# Altium PCB PFC-120W.PcbDoc
Units mil, origin at the board's own origin, x right, y up, seen from the top; angles counter-clockwise.
Board outline 4015.75 x 3385.83 mil, 2 copper layers (Top Layer, Bottom Layer); 25 components, 20 nets, 72 pads, 5 vias.
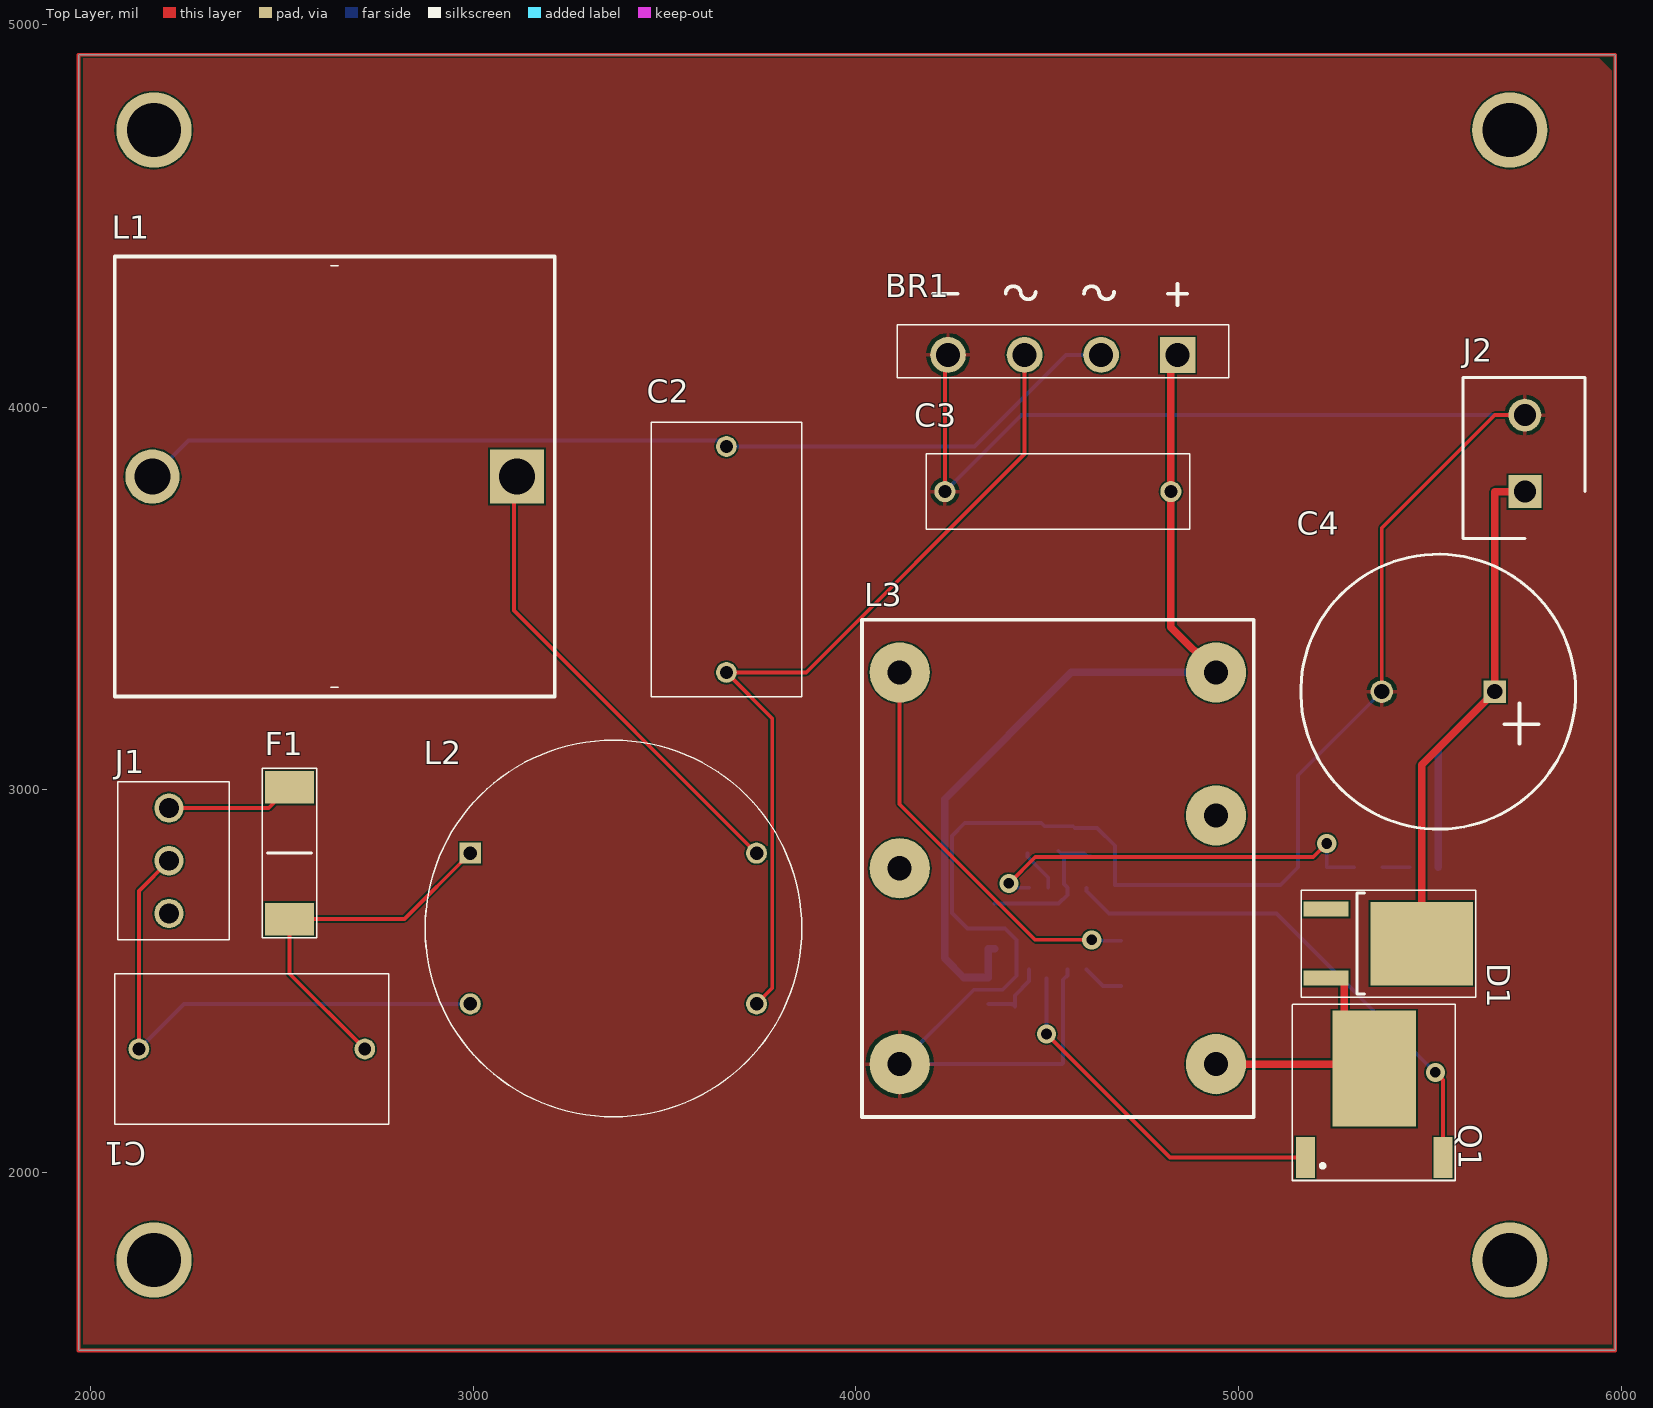
[diagram p0: Top Layer view]
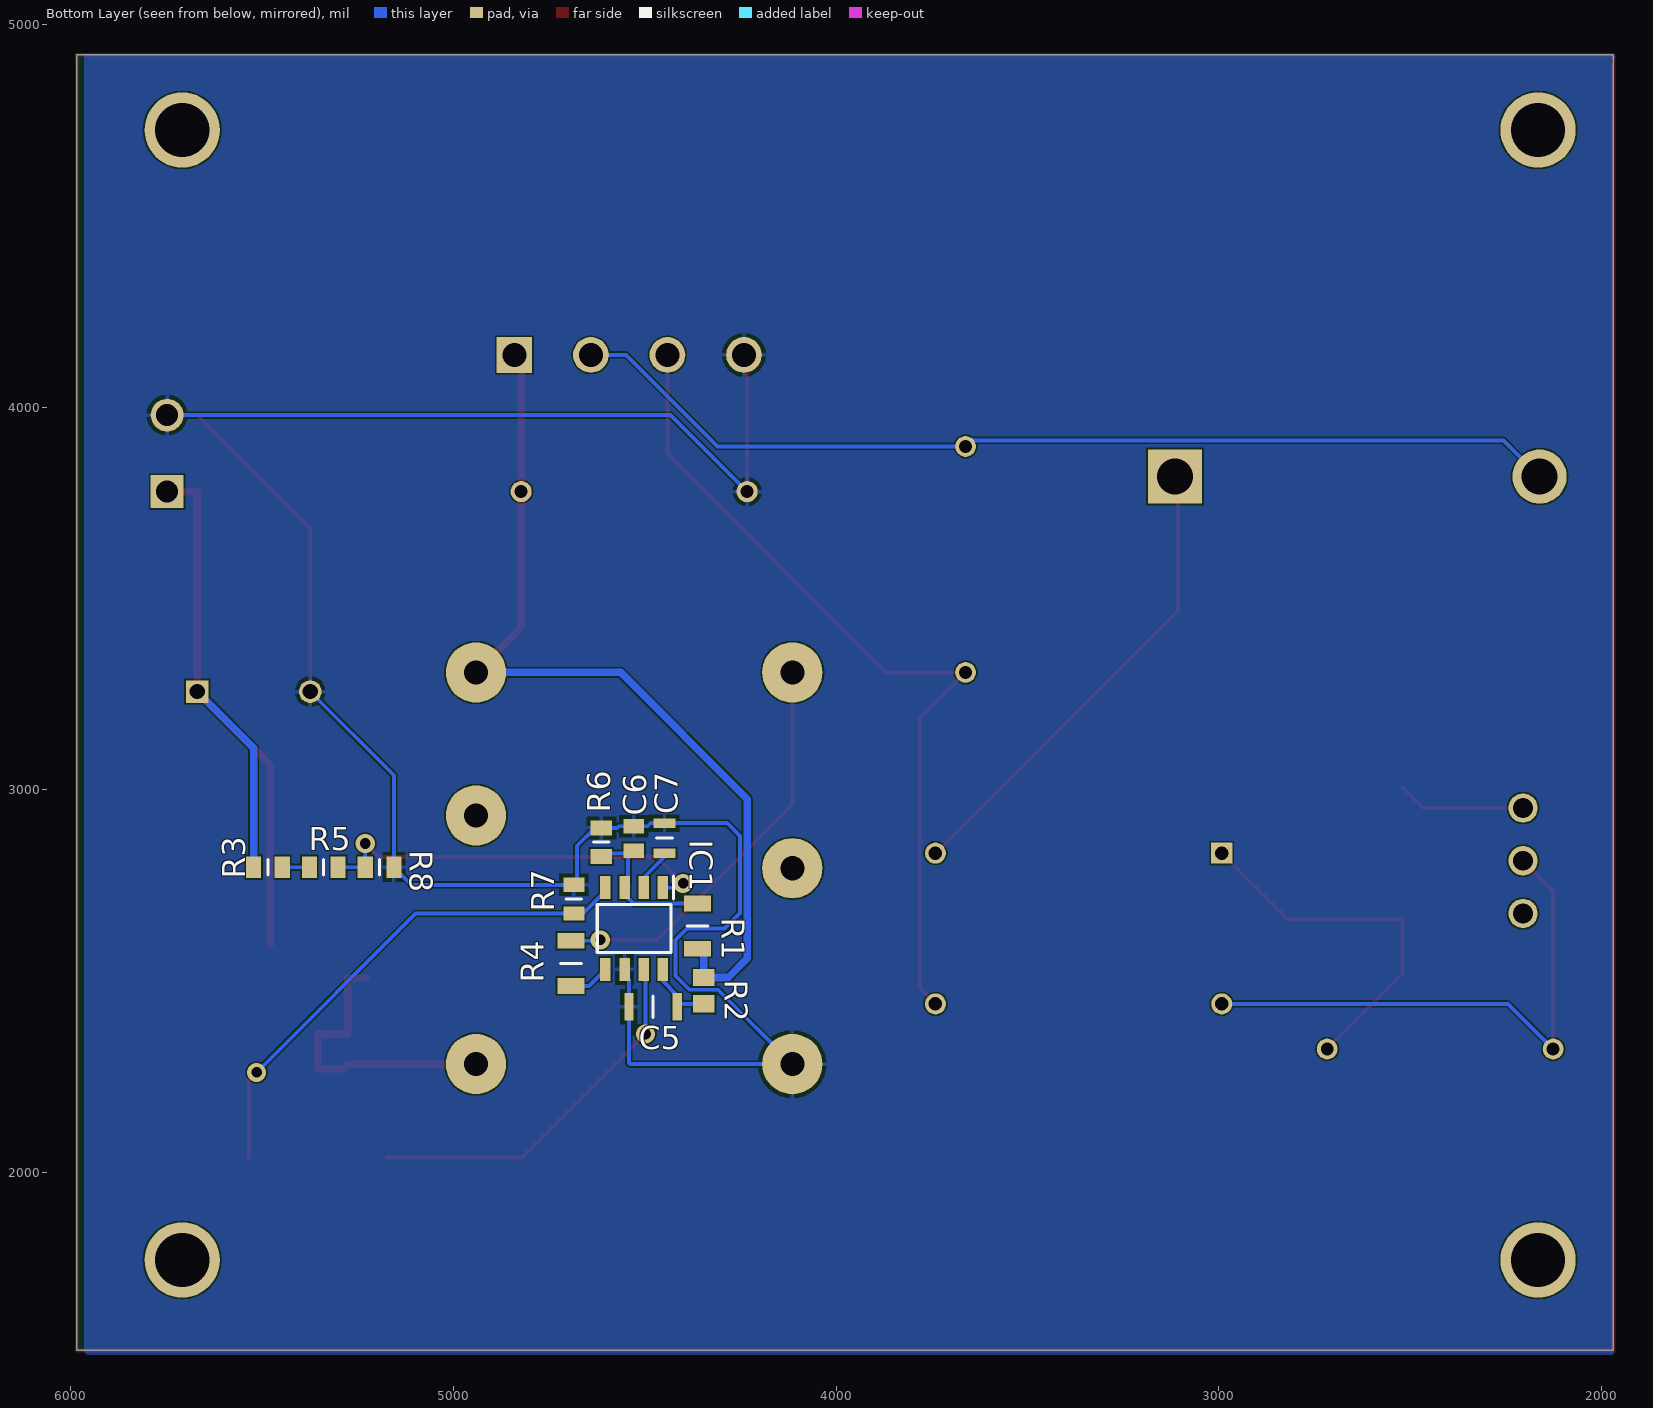
[diagram p1: Bottom Layer view, seen from below]
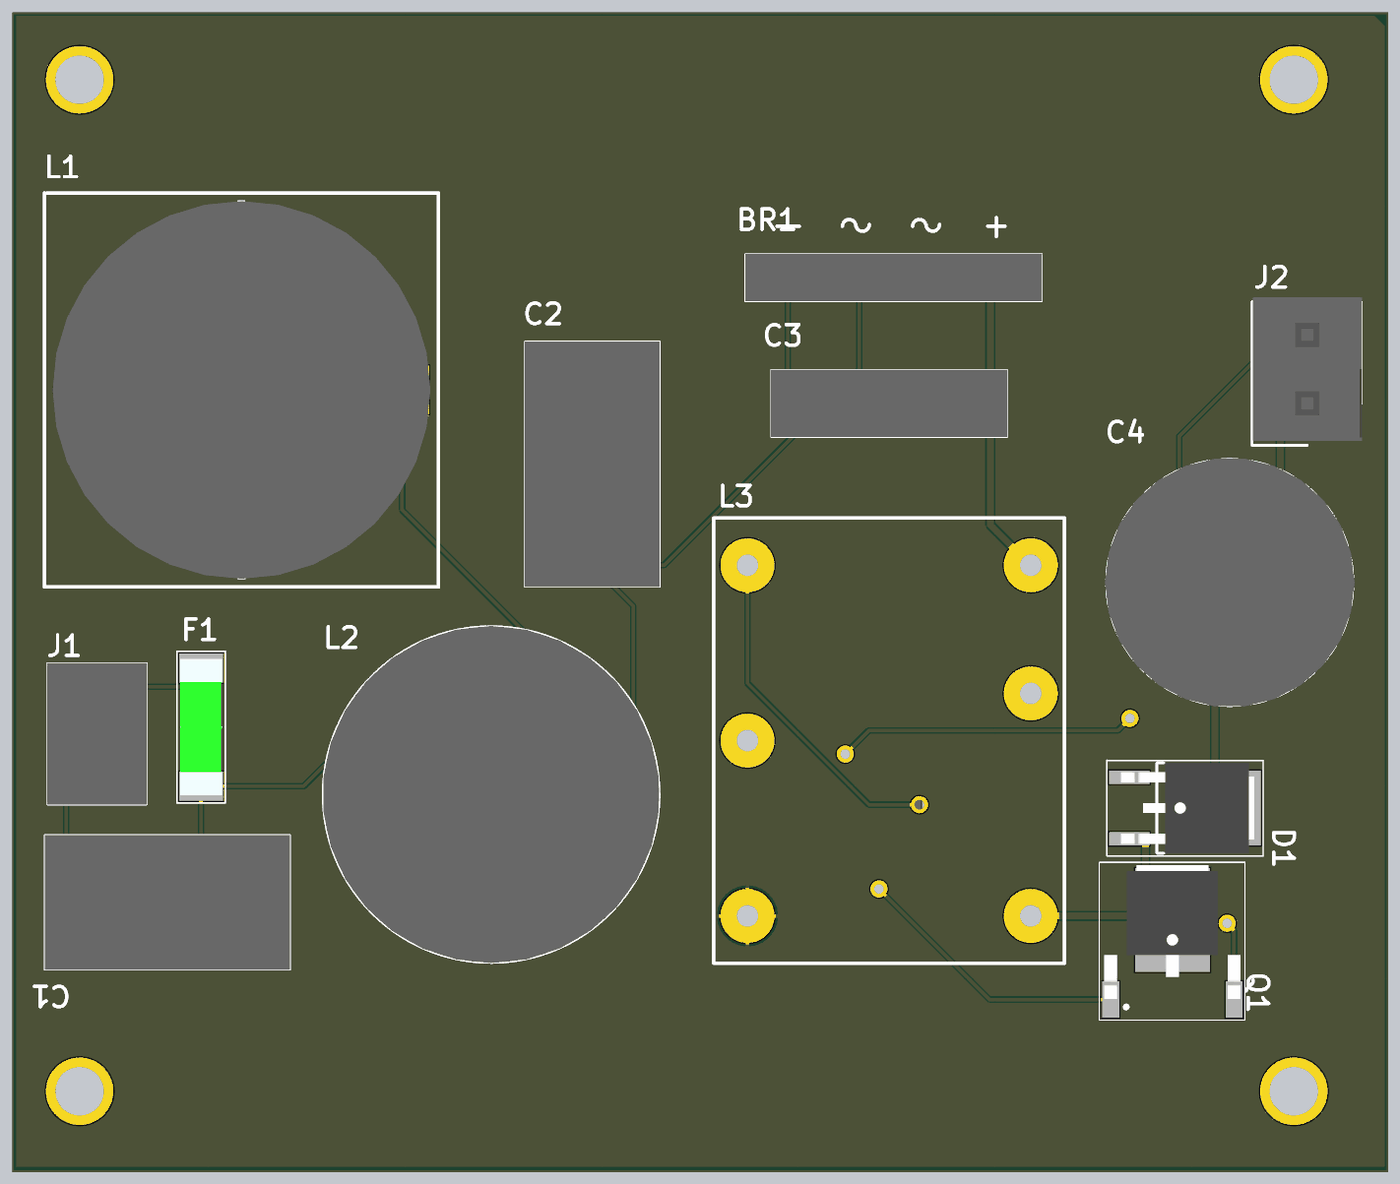
[diagram p2: 3D render of the assembled board from above, using the file's embedded part models]
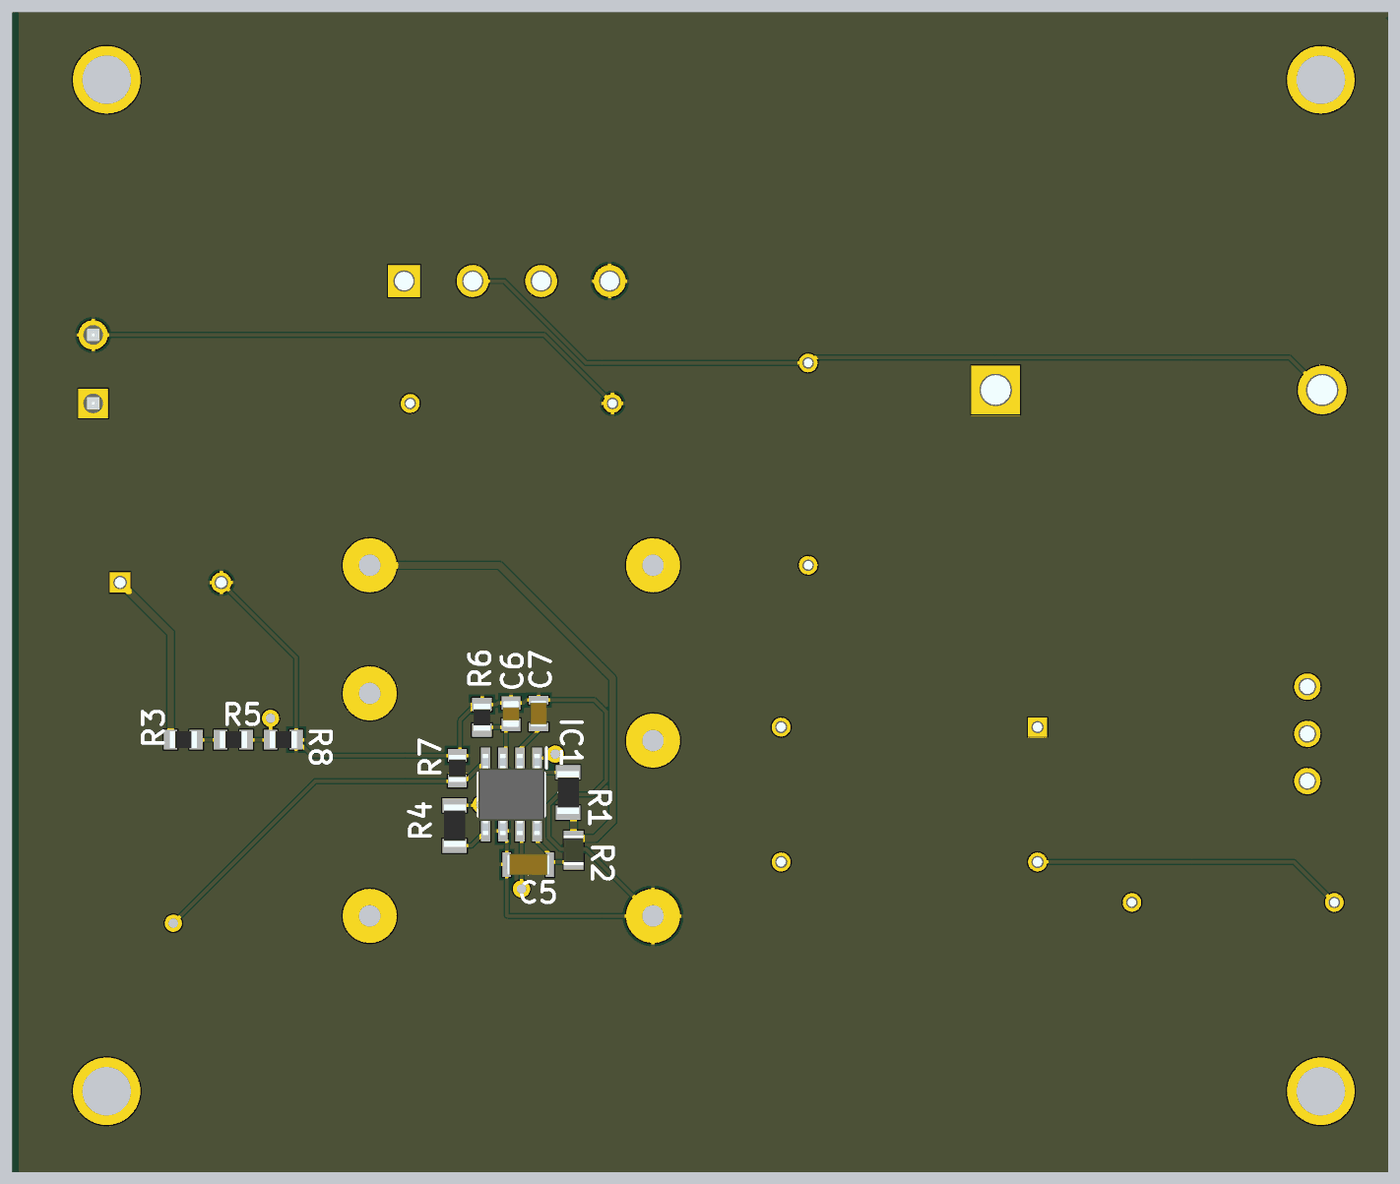
[diagram p3: 3D render of the assembled board from below, using the file's embedded part models]

## Layer stack, top to bottom
Top Solder: solder mask 0.4, Solder Resist, Dk 3.5
Top Layer: signal copper 1.4
Dielectric 1: dielectric 12.6, FR-4, Dk 4.8
Bottom Layer: signal copper 1.4
Bottom Solder: solder mask 0.4, Solder Resist, Dk 3.5

## Board outline
1968.5,1535.43 1968.5,4921.26 5984.25,4921.26 5984.25,1535.43

## Design rules (kind name [scope] priority, off if disabled: settings)
Clearance [All] p1: gap=3.94
Height [All] p1: minheight=0 maxheight=10000 prefheight=500
HoleSize [All] p1: absolutevalues=TRUE maxlimit=150 minlimit=0.39 maxpercent=80.000 minpercent=20.000
MinimumSolderMaskSliver [All] p1 off: minsoldermaskwidth=10
PolygonConnect [All] p1: connectstyle=Relief reliefconductorwidth=10 reliefentries=4 polygonreliefangle="90 Angle" airgapwidth=10
RoutingVias [All] p1: holewidth=28 width=50 viastyle="Through Hole" minholewidth=28 minwidth=50 maxholewidth=28 maxwidth=50
SilkToSolderMaskClearance [IsPad] p1: minsilkscreentomaskgap=0.39 clearancetoexposedcopper=TRUE
SolderMaskExpansion [All] p1: expansion=4
Width "Schematic Width Constraint_2" [InNet('NetC4_1')] p1: maxlimit=19.68 minlimit=19.68 preferedwidth=19.68
Width "Schematic Width Constraint_1" [InNet('NetD1_A')] p2: maxlimit=19.68 minlimit=19.68 preferedwidth=19.68
Width "Schematic Width Constraint" [InNet('NetBR1_1')] p3: maxlimit=19.68 minlimit=19.68 preferedwidth=19.68
Width [All] p4: maxlimit=10 minlimit=10 preferedwidth=10
26 further rules are at their usual default settings.

## Components (designator, comment, footprint, x,y, rotation, side; value= is the part's Value field where it differs from the comment)
BR1 "GBU6J" GBU6J 4840.55,4136.81 r0 top
C1 "C-0.47uF-630VDC" ECWFA2J474JC 2716.54,2322.83 r180 top
C2 "C-0.47uF-630VDC" ECWFA2J474JC 3661.42,3897.64 r270 top
C3 "C-0.1uF-630VDC" BFC233923104 4527.56,3779.53 r180 top
C4 "C-68uF-450V-El" CAPPRD750W80D1825H3750 5669.29,3256.72 r180 top
C5 "C-47uF-25V-1206" CAPC3216X180N 4478.24,2433.4 r0 bottom
C6 "C-1nF-50V-0805" CAPC2012X135N 4528.54,2873.12 r90 bottom
C7 "C-3.3uF-25V-0805" CAPC2012X145N 4448.06,2873.91 r90 bottom
D1 "STTH5L06" DPAK-STTH5L06 5393.7,2598.43 r0 top
F1 "F-2A" FUSC10131X312N 2519.68,2834.65 r270 top
IC1 "NCP1608BDR2G" SOIC127P600X175-8N 4527.56,2637.8 r270 bottom
J1 "J-3-1x3-3.5P-10A" 691214110003 2204.72,2952.76 r270 top
J2 "J-2-1x2-5.08P-15A" RHDR2W90P0X508_1X2_1066X810X1000P 5748.03,3779.53 r90 top
L1 "L-180uH-L_EMI" AIRD03181K 2637.8,3818.9 r180 top
L2 "4.5mH-5A-CMC" SC05E45JH 2992.13,2834.65 r270 top
L3 "L-300uH-LBoost" L-300UH-LBOOST 4527.56,2795.28 r0 top
Q1 "FCD600N60Z" DPAK-FCD600N60Z 5354.33,2204.72 r90 top
R1 "R-1.5M" RESC3216X60N 4362.04,2643.86 r90 bottom
R2 "R-657k" 0805_RES 4345.79,2475.38 r270 bottom
R3 "R-2M-0805" RESC2012X65N 5484.59,2798.06 r180 bottom
R4 "R-10k-1206" RESC3216X60N 4693.08,2546.98 r270 bottom
R5 "R-2M-0805" RESC2012X65N 5338.75,2798.06 r180 bottom
R6 "R-365R" RESC2012X65N 4613.36,2863.36 r90 bottom
R7 "R-0.12R-0805" RESC2012X60N 4685.21,2714.47 r90 bottom
R8 "R-25k-0805" RESC2012X65N 5192.91,2798.06 r180 bottom

## Footprints (in the part's own frame and the unit in brackets; to place one, negate y for a bottom-side part, rotate by r counter-clockwise, add the part's x,y. Pads: shape width x height; smd on the part's side, far side on the other; paste and mask are expansions set on the pad)
0805_RES [mm] "Chip Resistor, 2-Leads, Body 2,00x1,25mm, IPC Medium Density"
  rect 1.15x1.45 smd: 1(-0.875,0) 2(0.875,0)
  body extent -1.1,-0.72 1.1,0.72, height 0.6
691214110003 [mm]
  round 1.95 hole 1.3: 1(0,0) 2(3.5,0) 3(7,0)
  silkscreen extent -1.75,-3.4 8.75,4, body extent -1.75,-3.4 8.75,4, height 8.6
AIRD03181K [mm]
  rect 3.6x3.6 hole 2.4: 1(-12.1,0)
  round 3.6 hole 2.4: 2(12.1,0)
  silkscreen extent -14.61,-14.61 14.61,14.61, body extent -14,-14 14,14, height 21.1
BFC233923104 [mil]
  round 55 hole 33.86: 1(-295.28,0) 2(295.28,0)
  silkscreen extent -344,-98 344,98, body extent -344,-98 344,98, height 437
CAPC2012X135N [mm]
  rect 0.96x1.39 smd: 1(-0.81,0) 2(0.81,0)
  body extent -1,-0.63 1,0.63, height 1.35
CAPC2012X145N [mm]
  rect 0.62x1.47 smd: 1(-1,0) 2(1,0)
  silkscreen extent 0,-0.53 0,0.53, body extent -1,-0.63 1,0.63, height 1.45
CAPC3216X180N [mm]
  rect 0.62x1.82 smd: 1(-1.6,0) 2(1.6,0)
  silkscreen extent 0,-0.7 0,0.7, body extent -1.6,-0.8 1.6,0.8, height 1.8
CAPPRD750W80D1825H3750 [mm]
  rect 1.5x1.5 hole 1: 1(0,0)
  round 1.5 hole 1: 2(7.5,0)
  silkscreen extent -5.38,-9.12 12.87,9.12, body extent -5.5,-9.25 13,9.25, height 37.5
DPAK-FCD600N60Z [mm] "DPAK-FCD600N60Z"
  rect 7.7x5.55 smd: D(1.7,0)
  rect 2.7x1.25 smd: G(-4.2,4.57) S(-4.2,-4.57)
  silkscreen extent -5.72,-5.38 5.97,5.43, body extent -4.14,-5.04 5.76,5.04, height 2.52
DPAK-STTH5L06 [mm] "DPAK-STTH5L06"
  rect 3x1 smd: A(-4.191,-2.286) NC(-4.191,2.286)
  rect 6.8x5.55 smd: K(2.15,0)
  silkscreen extent -5.85,-3.55 5.72,3.55, body extent -4.8,-3.37 5.07,3.37, height 2.63
ECWFA2J474JC [mm]
  round 1.381 hole 0.85: 1(0,0) 2(15,0)
  silkscreen extent -1.6,-5 16.6,5, body extent -1.6,-5 16.6,5, height 16.7
FUSC10131X312N [mm]
  rect 2.16x3.23 smd: 1(-4.375,0) 2(4.375,0)
  silkscreen extent -5.63,-1.8 5.63,1.8, body extent -5.05,-1.56 5.05,1.56, height 3.12
GBU6J [mm]
  rect 2.37x2.37 hole 1.58: 1(0,0)
  round 2.37 hole 1.58: 2(-5.08,0) 3(-10.16,0) 4(-15.24,0)
  silkscreen extent -18.62,-1.5 3.38,4.7, body extent -18.62,-1.5 3.38,2, height 18.9
L-300UH-LBOOST [mm] "L-300uH-LBoost"
  round 4 hole 1.6: 1(-10.5,-13) 3(-10.5,0) 5(-10.5,13) 6(10.5,13) 7(10.5,3.5) 8(10.5,-13)
  silkscreen extent -13,-16.5 13,16.5, body extent -12.95,-16.51 12.95,16.51, height 27
RESC2012X60N [mm]
  rect 0.95x1.4 smd: 1(-0.95,0) 2(0.95,0)
  silkscreen extent 0,-0.53 0,0.53, body extent -1,-0.63 1,0.63, height 0.6
RESC2012X65N [mm]
  rect 1x1.45 smd: 1(-0.95,0) 2(0.95,0)
  silkscreen extent 0,-0.53 0,0.53, body extent -1,-0.63 1,0.63, height 0.65
RESC3216X60N [mm]
  rect 1.05x1.8 smd: 1(-1.5,0) 2(1.5,0)
  silkscreen extent 0,-0.7 0,0.7, body extent -1.58,-0.8 1.58,0.8, height 0.6
RHDR2W90P0X508_1X2_1066X810X1000P [mm]
  rect 2.175x2.175 hole 1.45: 1(0,0)
  round 2.175 hole 1.45: 2(5.08,0)
  silkscreen extent -3.1,-4 7.56,4.1, body extent -2.79,-4.05 7.87,4.05, height 10
SC05E45JH [mm]
  round 1.524 on Top Overlay: 0(-1.778,0)
  rect 1.4x1.4 hole 0.9: 1(0,0)
  round 1.4 hole 0.9: 2(0,19) 3(10,0) 4(10,19)
  silkscreen extent -7.5,-3 17.5,22, body extent -7.5,-3 17.5,22, height 21.1
SOIC127P600X175-8N [mm]
  rect 1.525x0.7 smd: 1(-2.712,1.905) 2(-2.712,0.635) 3(-2.712,-0.635) 4(-2.712,-1.905) 5(2.712,-1.905) 6(2.712,-0.635) 7(2.712,0.635) 8(2.712,1.905)
  silkscreen extent -3.47,-2.45 1.6,2.61, body extent -3,-2.45 3,2.45, height 1.75

## Part data
BR1: "Bridge Rectifier"
C1 C2 C3 C5 C6 C7: "Capacitor"
C4: "Capacitor Polarised"
D1: "Diode"
F1: "Fuse"
IC1: "Integrated Circuit"
J1 J2: "Connector"
L1 L3: "Inductor"
L2: "Filter"
Q1: "N-Mosfet"
R1 R2 R3 R4 R5 R7 R8: "Resistor"
R6: library part R-365R-0805, "Resistor"

## Free pads (board coordinates)
  round 196.85 hole 141.73: 0(2165.35,1771.65) 0(2165.35,4724.41) 0(5708.66,1771.65) 0(5708.66,4724.41)

## Via types
v1: diameter 50, hole 28, Top Layer to Bottom Layer, 5 vias

## Nets (pads, with @x,y where several pads share a name; then routed paths per layer and width w, separated by ;. In a path a pad name is that pad's centre, name@x,y a point inside that pad or via, vN(x,y) a via of type N, cw(c..) or ccw(c..) an arc to the next point about the centre after c; other vN are vias at no path point)
AC-L: F1.1 J1.1 | length 337.4
  Top Layer w10: J1.1 2465.55,2952.76 F1.1
AC-L-BR: BR1.2 C2.1 L1.2 | length 2623.9
  Bottom Layer w10: L1.2 2255.91,3913.39 3645.67,3913.39 C2.1 4309.64,3897.64 4548.81,4136.81 BR1.2
AC-N: C1.2 J1.2 L2.3 | length 1439.8
  Top Layer w10: C1.2 2125.98,2736.22 J1.2
  Bottom Layer w10: C1.2 2244.09,2440.94 L2.3
AC-N-BR: BR1.3 C2.2 L2.4 | length 2207.3
  Top Layer w10: L2.4 3781,2481.79 3781,3187.5 C2.2 3870.08,3307.09 4440.55,3877.56 BR1.3
EARTH: J1.3
GND: BR1.4 C3.2 C4.2 C5.2 C6.2 C7.2 IC1.6 J2.2 L3.1 R6.2 R7.2 R8.2 | length 6068.1
  Top Layer w10: C3.2 4232.28,4114.17 4240.55,4122.44 BR1.4 ; C4.2 5374.02,3684.25 5669.29,3979.53 J2.2
  Bottom Layer w10: C3.2 4432.28,3979.53 J2.2 ; IC1.6 4552.56,2515.16 4541.23,2503.83 C5.2 4541.23,2286 4538.69,2283.46 L3.1 4308.71,2478 4383,2478 4419.29,2514.29 4419.29,2608.27 4389.76,2637.8 4291.34,2637.8 4251,2678.13 4251,2880 4284.28,2913.28 C7.2 4484,2913.28 4492.27,2905.01 C6.2 4568,2905.01 4572.25,2900.76 R6.2 4630.24,2900.76 4677,2854 4677,2751.87 R7.2 5109.32,2751.87 R8.2 5155.51,3038.22 C4.2
NetBR1_1: BR1.1 C3.1 L3.6 R1.1 R2.1 | length 2373.9
  Top Layer w19.68: BR1.1 4822.83,4119.09 C3.1 4822.83,3425.2 L3.6
  Bottom Layer w19.68: R1.1 4345.79,2584.8 R2.1 4282.17,2509.83 4232,2560 4232,2976 4563.09,3307.09 L3.6
NetC1_1: C1.1 F1.2 L2.1 | length 964.9
  Top Layer w10: C1.1 2519.69,2519.68 F1.2 2819.88,2662.4 L2.1
NetC4_1: C4.1 D1.K J2.1 R3.1 | length 1858.6
  Top Layer w19.68: D1.K 5478.35,3065.78 C4.1 5669.29,3779.53 J2.1
  Bottom Layer w19.68: R3.1 5521.99,3109.42 C4.1
NetC5_1: C5.1 IC1.8 R2.2 | length 185.7
  Bottom Layer w10: R2.2 4407.71,2440.94 C5.1 4415.25,2463 4452.56,2500.31 IC1.8
NetC6_1: C6.1 IC1.3 R1.2 R6.1 | length 416.5
  Bottom Layer w10: R1.2 4529.69,2702.91 4552.56,2725.79 IC1.3 4543.31,2753.82 4543.31,2826.47 C6.1 4535.13,2834.65 4596.46,2834.65 4605.15,2825.95 R6.1
NetC7_1: C7.1 IC1.2 | length 112.5
  Bottom Layer w10: C7.1 4448.06,2825.56 4502.56,2771.06 IC1.2
NetD1_A: D1.A L3.8 Q1.D | length 780.7
  Top Layer w19.68: L3.8 5275.59,2283.46 5287.4,2271.65 Q1.D 5354.33,2362.2 5275.59,2362.2 5275.59,2508.43 D1.A
NetIC1_1: IC1.1 R5.2 R8.1 | length 1058.6
  Top Layer w10: v1(4399.61,2755.91) 4468.5,2824.8 5194.88,2824.8 v1(5230.32,2860.24)
  Bottom Layer w10: v1@4401.1,2744.57 IC1.1 ; v1(5230.32,2860.24) R8.1 R5.2
NetIC1_4: IC1.4 Q1.S R7.1 | length 1347.4
  Top Layer w10: v1(5514,2262) 5534.25,2241.75 Q1.S
  Bottom Layer w10: IC1.4 4602.56,2736.02 4661.52,2677.07 R7.1 5098.93,2677.07 v1(5514,2262)
NetIC1_5: IC1.5 R4.2 | length 108.4
  Bottom Layer w10: IC1.5 4645.66,2487.92 R4.2
NetIC1_7: IC1.7 Q1.G | length 954.7
  Top Layer w10: v1(4498.03,2362.2) 4820.87,2039.37 Q1.G
  Bottom Layer w10: v1(4498.03,2362.2) IC1.7@4498.03,2506.81
NetL1_1: L1.1 L2.2 | length 1250.1
  Top Layer w10: L1.1 3106.3,3811.02 3106.3,3468.5 L2.2
NetL3_5: L3.5 R4.1 | length 1064.3
  Top Layer w10: L3.5 4114.17,2962.6 4468.5,2608.27 v1(4616.14,2608.27)
  Bottom Layer w10: v1@4622,2606.03 R4.1
NetR3_2: R3.2 R5.1 | length 71
  Bottom Layer w10: R5.1 R3.2
pads on no net: D1.NC L2.0 L3.3 L3.7
copper on no net: | length 14803.1
  Top Layer w10: 1968.5,1535.43 1968.5,4921.26 5984.25,4921.26 5984.25,1535.43 1968.5,1535.43

## Polygon pours and split planes (outlines as drawn)
GND on Top Layer "GND" (solid, pour order 2): 1980.32,1543.31 1980.32,4921.26 5933.07,4921.26 5964.57,4889.76 5976.38,4877.95 5976.38,1551.18 1980.31,1551.18 1968.5,1562.99
GND on Bottom Layer "GND" (solid, pour order 4): 1960.63,4913.39 1968.5,4921.26 5964.57,4921.26 5964.57,1531.5 5956.69,1523.62 1968.5,1523.62 1968.5,4897.64 1976.38,4905.51